# Altium PCB MyBus.PcbDoc
Units mm, origin at the board's own origin, x right, y up, seen from the top; angles counter-clockwise.
Board outline 243.02 x 226.22 mm, 2 copper layers (Top Layer, Bottom Layer); 112 components, 64 nets, 1804 pads, 0 vias.
Unrouted connection lines stored in the file: 1728.
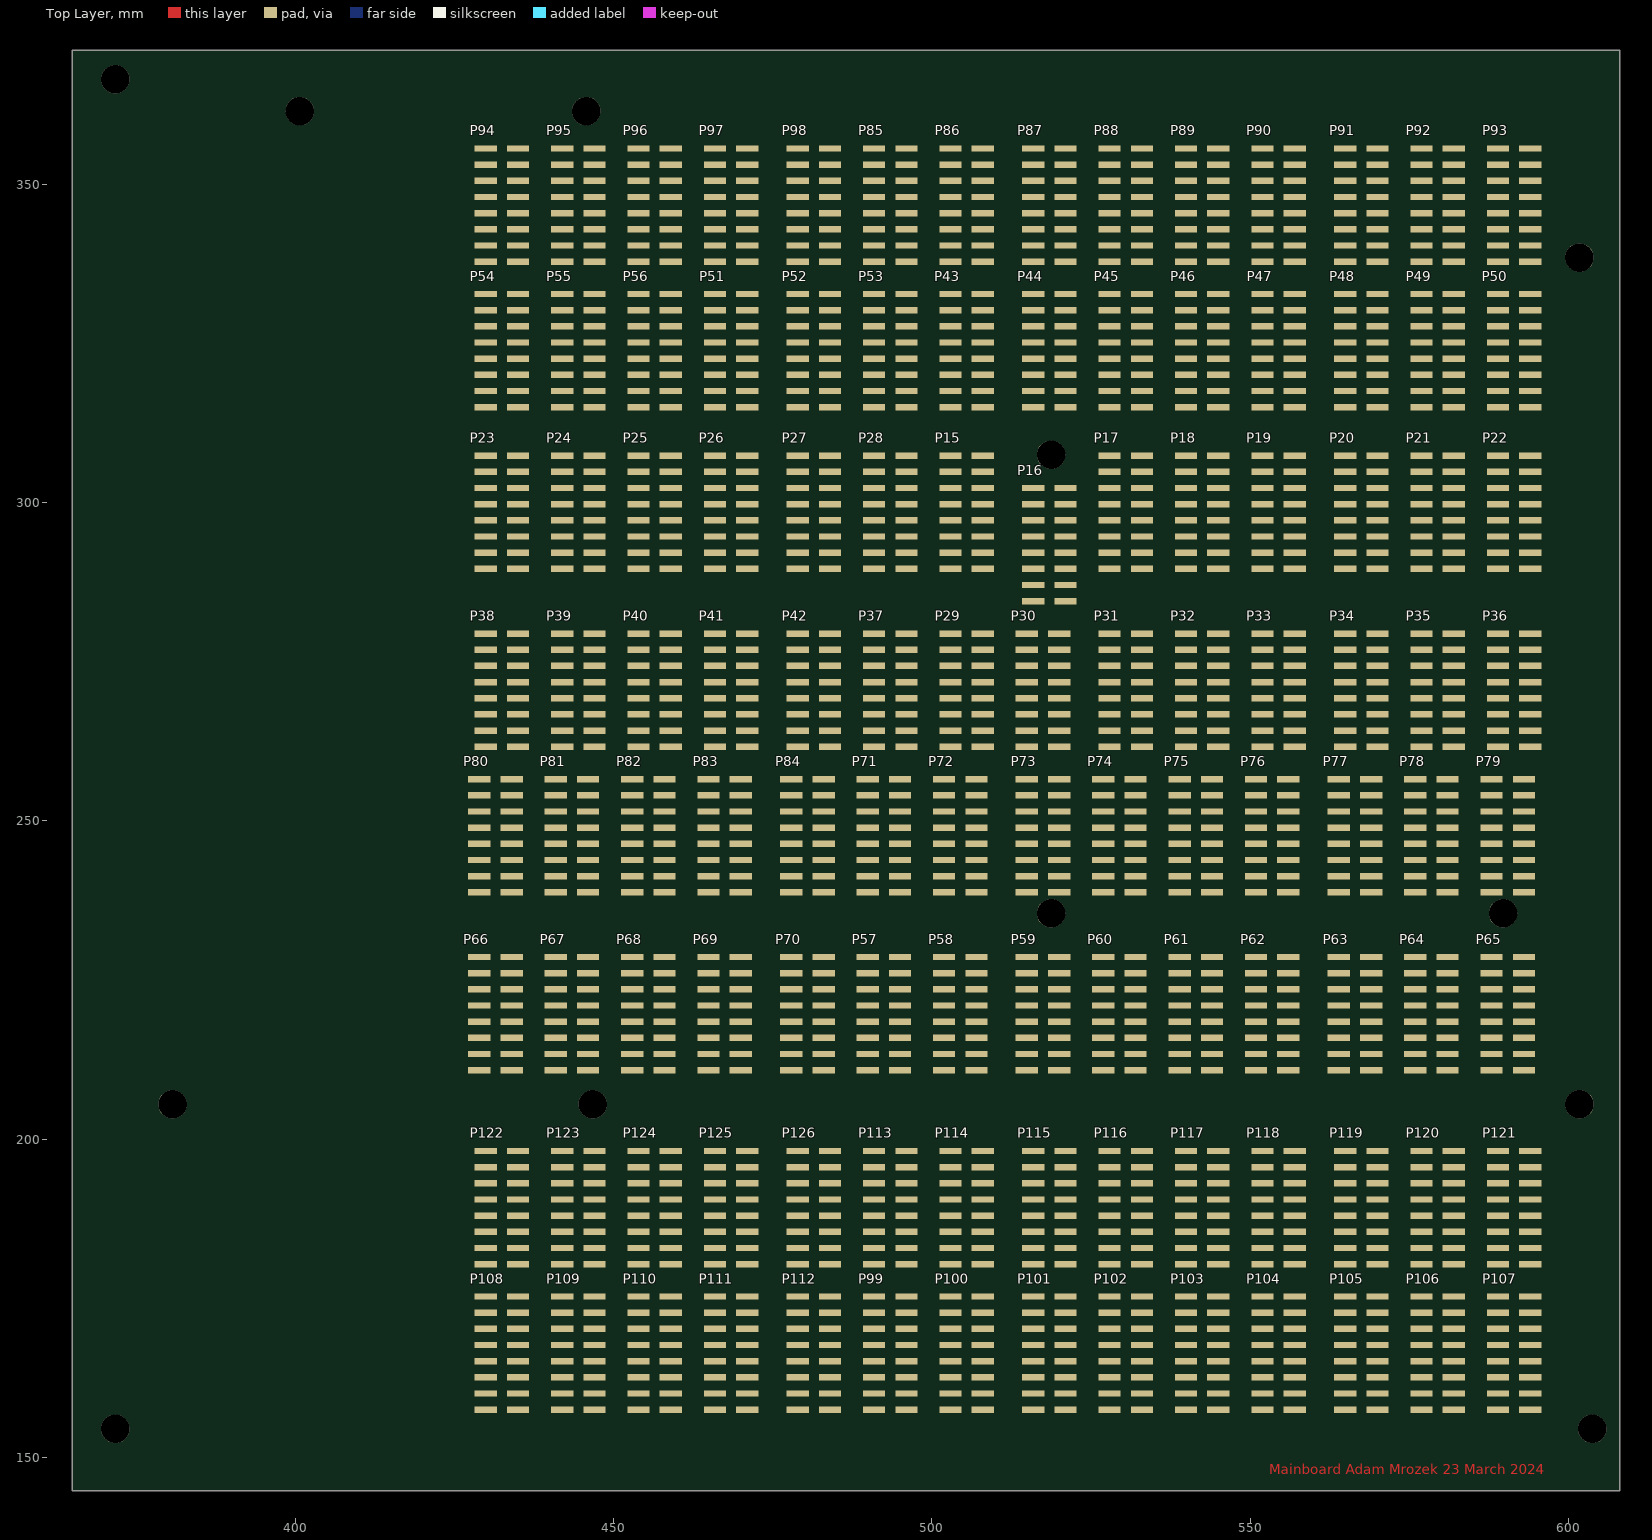
[diagram p0: Top Layer view]
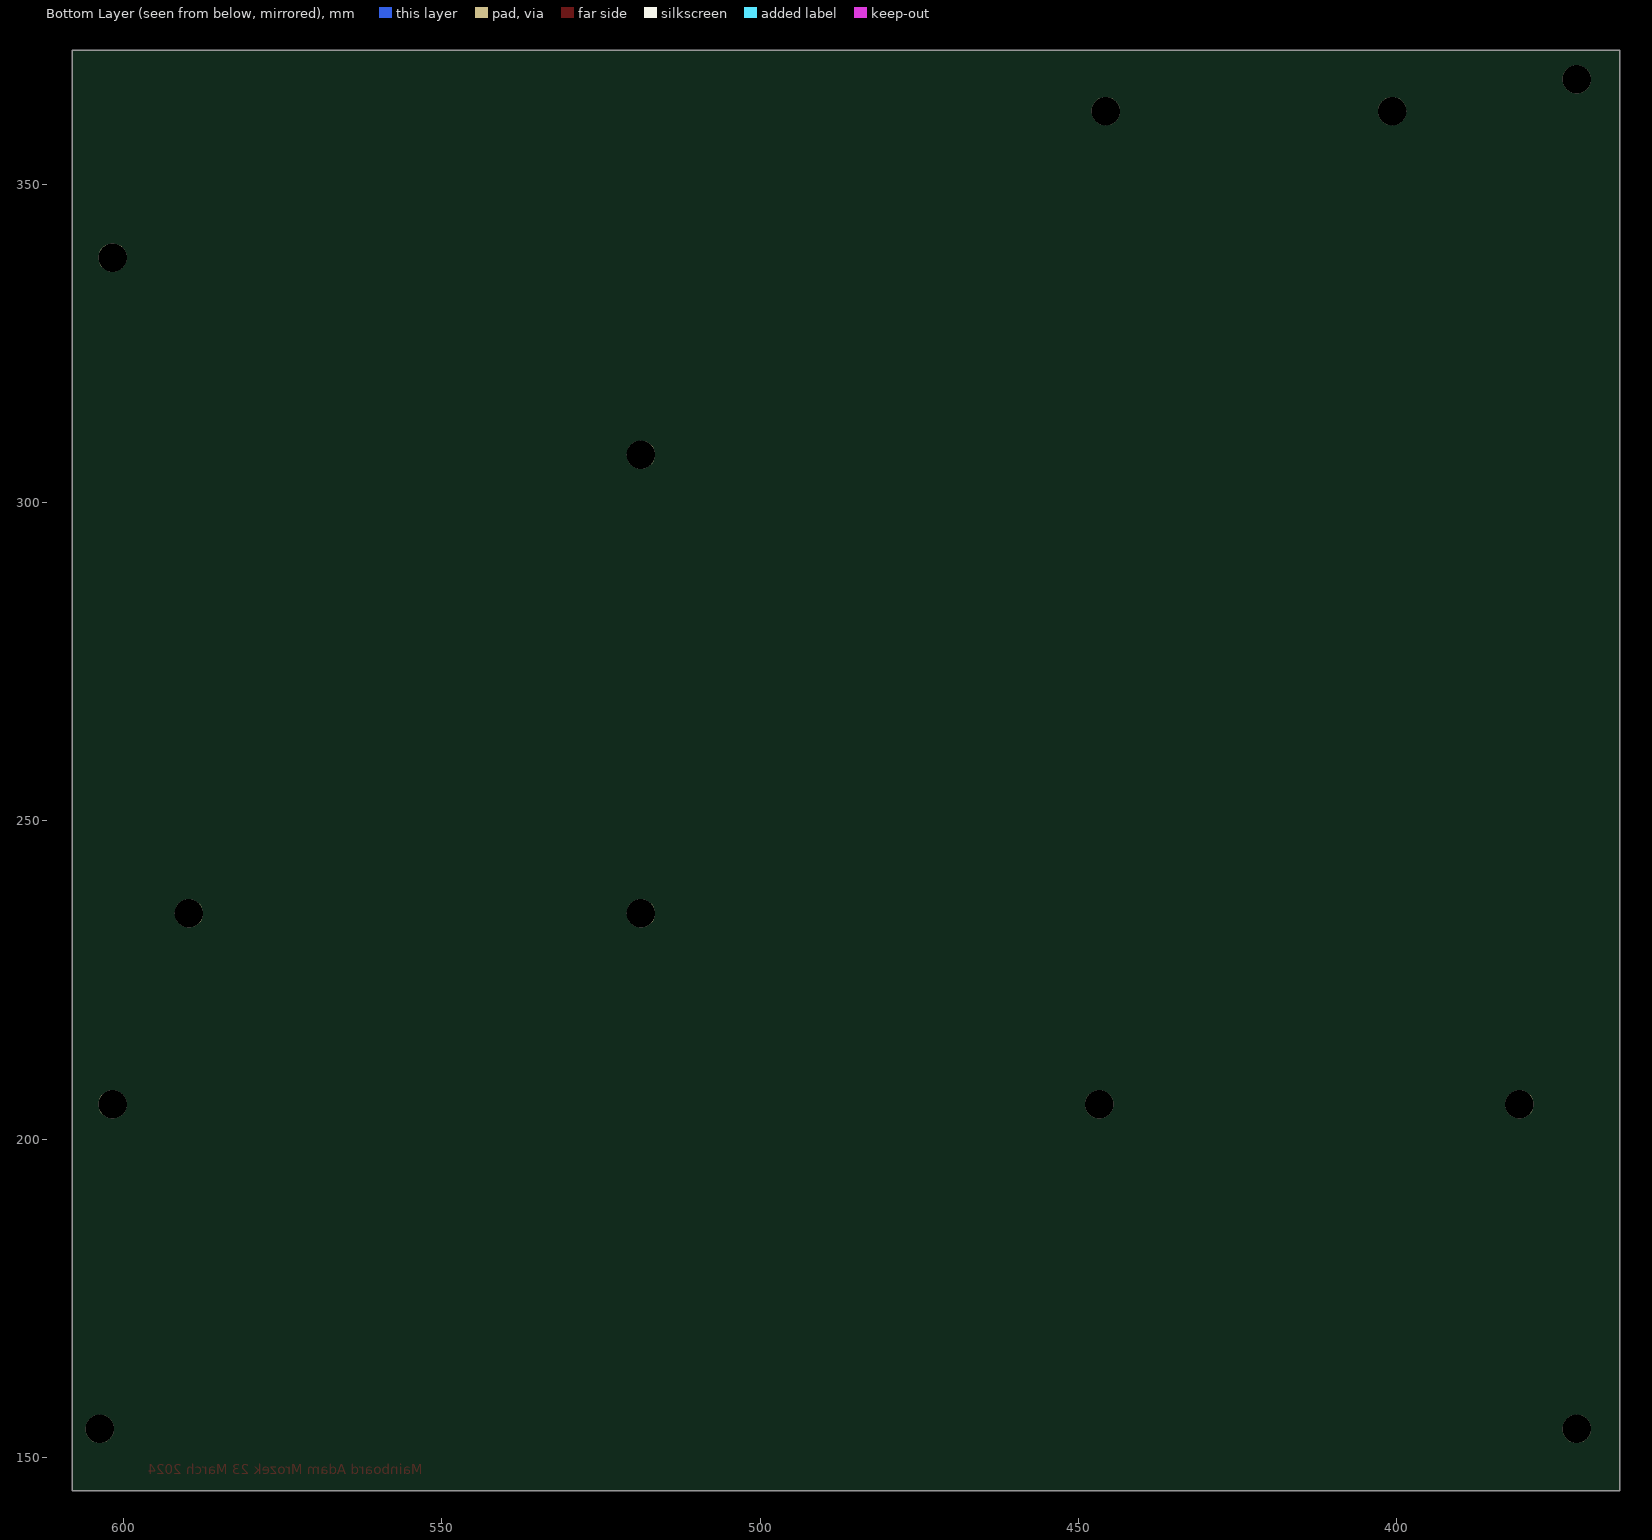
[diagram p1: Bottom Layer view, seen from below]

## Layer stack, top to bottom
Top Solder: solder mask 0.0102, Solder Resist, Dk 3.5
Top Layer: signal copper 0.0356
Dielectric 1: dielectric 0.32, FR-4, Dk 4.8
Bottom Layer: signal copper 0.0356
Bottom Solder: solder mask 0.0102, Solder Resist, Dk 3.5

## Board outline
365,144.78 365,371 608.025,371 608.025,144.78

## Design rules (kind name [scope] priority, off if disabled: settings)
Clearance [All] p1: gap=0.254 ignorepadtopadclearanceinfootprint=FALSE except(0: Arc-Hole Track-Hole SMDPad-Hole THPad-Hole Via-Hole Fill-Hole Poly-Hole Region-Hole Text-Hole)
PolygonConnect [All] p1: connectstyle=Relief reliefconductorwidth=0.254 reliefentries=4 polygonreliefangle="90 Angle" airgapwidth=0.5
RoomDefinition SubBus8 [InComponentClass('SubBus8')] p1: confinementstyle=ConfineIn formatcopy=TRUE lockcomponents=FALSE outline 0,0 50.8,0 50.8,25.4 0,25.4
RoomDefinition SubBus7 [InComponentClass('SubBus7')] p2: confinementstyle=ConfineIn formatcopy=TRUE lockcomponents=FALSE outline 0,0 50.8,0 50.8,25.4 0,25.4
RoomDefinition SubBus6 [InComponentClass('SubBus6')] p3: confinementstyle=ConfineIn formatcopy=TRUE lockcomponents=FALSE outline 0,0 50.8,0 50.8,25.4 0,25.4
RoomDefinition SubBus5 [InComponentClass('SubBus5')] p4: confinementstyle=ConfineIn formatcopy=TRUE lockcomponents=FALSE outline 0,0 50.8,0 50.8,25.4 0,25.4
RoomDefinition SubBus4 [InComponentClass('SubBus4')] p5: confinementstyle=ConfineIn formatcopy=TRUE lockcomponents=FALSE outline 0,0 50.8,0 50.8,25.4 0,25.4
RoomDefinition SubBus3 [InComponentClass('SubBus3')] p6: confinementstyle=ConfineIn formatcopy=TRUE lockcomponents=FALSE outline 0,0 50.8,0 50.8,25.4 0,25.4
RoomDefinition SubBus2 [InComponentClass('SubBus2')] p7: confinementstyle=ConfineIn formatcopy=TRUE lockcomponents=FALSE outline 0,0 50.8,0 50.8,25.4 0,25.4
RoomDefinition SubBus1 [InComponentClass('SubBus1')] p8: confinementstyle=ConfineIn formatcopy=TRUE lockcomponents=FALSE outline 0,0 50.8,0 50.8,25.4 0,25.4
RoutingVias [All] p1: holewidth=0.711 width=1.27 viastyle="Through Hole" minholewidth=0.711 minwidth=1.27 maxholewidth=0.711 maxwidth=1.27
SolderMaskExpansion [All] p1: expansion=0.102
Width [All] p1: maxlimit=1 minlimit=0.5 preferedwidth=1 minimp=50.000000 maximp=50.000000 favimp=50.000000
30 further rules are at their usual default settings.

## Classes and differential pairs
component class SubBus8: P113 P114 P115 P116 P117 P118 P119 P120 P121 P122 P123 P124 P125 P126
component class SubBus7: P99 P100 P101 P102 P103 P104 P105 P106 P107 P108 P109 P110 P111 P112
component class SubBus6: P85 P86 P87 P88 P89 P90 P91 P92 P93 P94 P95 P96 P97 P98
component class SubBus5: P71 P72 P73 P74 P75 P76 P77 P78 P79 P80 P81 P82 P83 P84
component class SubBus4: P57 P58 P59 P60 P61 P62 P63 P64 P65 P66 P67 P68 P69 P70
component class SubBus3: P43 P44 P45 P46 P47 P48 P49 P50 P51 P52 P53 P54 P55 P56
component class SubBus1: P29 P30 P31 P32 P33 P34 P35 P36 P37 P38 P39 P40 P41 P42
component class SubBus2: P15 P16 P17 P18 P19 P20 P21 P22 P23 P24 P25 P26 P27 P28

## Components (designator, comment, footprint, x,y, rotation, side; value= is the part's Value field where it differs from the comment)
P15 "2x8 Pin Header  SMD" 2X8_SMD_PH_2.54 508,289.56 r90 top value="2x8 Pin Header, 2.54mm, SMD"
P16 "2x8 Pin Header  SMD" 2X8_SMD_PH_2.54 521,284.48 r90 top value="2x8 Pin Header, 2.54mm, SMD"
P17 "2x8 Pin Header  SMD" 2X8_SMD_PH_2.54 533,289.56 r90 top value="2x8 Pin Header, 2.54mm, SMD"
P18 "2x8 Pin Header  SMD" 2X8_SMD_PH_2.54 545,289.56 r90 top value="2x8 Pin Header, 2.54mm, SMD"
P19 "2x8 Pin Header  SMD" 2X8_SMD_PH_2.54 557,289.56 r90 top value="2x8 Pin Header, 2.54mm, SMD"
P20 "2x8 Pin Header  SMD" 2X8_SMD_PH_2.54 570,289.56 r90 top value="2x8 Pin Header, 2.54mm, SMD"
P21 "2x8 Pin Header  SMD" 2X8_SMD_PH_2.54 582,289.56 r90 top value="2x8 Pin Header, 2.54mm, SMD"
P22 "2x8 Pin Header  SMD" 2X8_SMD_PH_2.54 594,289.56 r90 top value="2x8 Pin Header, 2.54mm, SMD"
P23 "2x8 Pin Header  SMD" 2X8_SMD_PH_2.54 435,289.56 r90 top value="2x8 Pin Header, 2.54mm, SMD"
P24 "2x8 Pin Header  SMD" 2X8_SMD_PH_2.54 447,289.56 r90 top value="2x8 Pin Header, 2.54mm, SMD"
P25 "2x8 Pin Header  SMD" 2X8_SMD_PH_2.54 459,289.56 r90 top value="2x8 Pin Header, 2.54mm, SMD"
P26 "2x8 Pin Header  SMD" 2X8_SMD_PH_2.54 471,289.56 r90 top value="2x8 Pin Header, 2.54mm, SMD"
P27 "2x8 Pin Header  SMD" 2X8_SMD_PH_2.54 484,289.56 r90 top value="2x8 Pin Header, 2.54mm, SMD"
P28 "2x8 Pin Header  SMD" 2X8_SMD_PH_2.54 496,289.56 r90 top value="2x8 Pin Header, 2.54mm, SMD"
P29 "2x8 Pin Header  SMD" 2X8_SMD_PH_2.54 508,261.62 r90 top value="2x8 Pin Header, 2.54mm, SMD"
P30 "2x8 Pin Header  SMD" 2X8_SMD_PH_2.54 520,261.62 r90 top value="2x8 Pin Header, 2.54mm, SMD"
P31 "2x8 Pin Header  SMD" 2X8_SMD_PH_2.54 533,261.62 r90 top value="2x8 Pin Header, 2.54mm, SMD"
P32 "2x8 Pin Header  SMD" 2X8_SMD_PH_2.54 545,261.62 r90 top value="2x8 Pin Header, 2.54mm, SMD"
P33 "2x8 Pin Header  SMD" 2X8_SMD_PH_2.54 557,261.62 r90 top value="2x8 Pin Header, 2.54mm, SMD"
P34 "2x8 Pin Header  SMD" 2X8_SMD_PH_2.54 570,261.62 r90 top value="2x8 Pin Header, 2.54mm, SMD"
P35 "2x8 Pin Header  SMD" 2X8_SMD_PH_2.54 582,261.62 r90 top value="2x8 Pin Header, 2.54mm, SMD"
P36 "2x8 Pin Header  SMD" 2X8_SMD_PH_2.54 594,261.62 r90 top value="2x8 Pin Header, 2.54mm, SMD"
P37 "2x8 Pin Header  SMD" 2X8_SMD_PH_2.54 496,261.62 r90 top value="2x8 Pin Header, 2.54mm, SMD"
P38 "2x8 Pin Header  SMD" 2X8_SMD_PH_2.54 435,261.62 r90 top value="2x8 Pin Header, 2.54mm, SMD"
P39 "2x8 Pin Header  SMD" 2X8_SMD_PH_2.54 447,261.62 r90 top value="2x8 Pin Header, 2.54mm, SMD"
P40 "2x8 Pin Header  SMD" 2X8_SMD_PH_2.54 459,261.62 r90 top value="2x8 Pin Header, 2.54mm, SMD"
P41 "2x8 Pin Header  SMD" 2X8_SMD_PH_2.54 471,261.62 r90 top value="2x8 Pin Header, 2.54mm, SMD"
P42 "2x8 Pin Header  SMD" 2X8_SMD_PH_2.54 484,261.62 r90 top value="2x8 Pin Header, 2.54mm, SMD"
P43 "2x8 Pin Header  SMD" 2X8_SMD_PH_2.54 508,314.96 r90 top value="2x8 Pin Header, 2.54mm, SMD"
P44 "2x8 Pin Header  SMD" 2X8_SMD_PH_2.54 521,314.96 r90 top value="2x8 Pin Header, 2.54mm, SMD"
P45 "2x8 Pin Header  SMD" 2X8_SMD_PH_2.54 533,314.96 r90 top value="2x8 Pin Header, 2.54mm, SMD"
P46 "2x8 Pin Header  SMD" 2X8_SMD_PH_2.54 545,314.96 r90 top value="2x8 Pin Header, 2.54mm, SMD"
P47 "2x8 Pin Header  SMD" 2X8_SMD_PH_2.54 557,314.96 r90 top value="2x8 Pin Header, 2.54mm, SMD"
P48 "2x8 Pin Header  SMD" 2X8_SMD_PH_2.54 570,314.96 r90 top value="2x8 Pin Header, 2.54mm, SMD"
P49 "2x8 Pin Header  SMD" 2X8_SMD_PH_2.54 582,314.96 r90 top value="2x8 Pin Header, 2.54mm, SMD"
P50 "2x8 Pin Header  SMD" 2X8_SMD_PH_2.54 594,314.96 r90 top value="2x8 Pin Header, 2.54mm, SMD"
P51 "2x8 Pin Header  SMD" 2X8_SMD_PH_2.54 471,314.96 r90 top value="2x8 Pin Header, 2.54mm, SMD"
P52 "2x8 Pin Header  SMD" 2X8_SMD_PH_2.54 484,314.96 r90 top value="2x8 Pin Header, 2.54mm, SMD"
P53 "2x8 Pin Header  SMD" 2X8_SMD_PH_2.54 496,314.96 r90 top value="2x8 Pin Header, 2.54mm, SMD"
P54 "2x8 Pin Header  SMD" 2X8_SMD_PH_2.54 435,314.96 r90 top value="2x8 Pin Header, 2.54mm, SMD"
P55 "2x8 Pin Header  SMD" 2X8_SMD_PH_2.54 447,314.96 r90 top value="2x8 Pin Header, 2.54mm, SMD"
P56 "2x8 Pin Header  SMD" 2X8_SMD_PH_2.54 459,314.96 r90 top value="2x8 Pin Header, 2.54mm, SMD"
P57 "2x8 Pin Header  SMD" 2X8_SMD_PH_2.54 495,210.82 r90 top value="2x8 Pin Header, 2.54mm, SMD"
P58 "2x8 Pin Header  SMD" 2X8_SMD_PH_2.54 507,210.82 r90 top value="2x8 Pin Header, 2.54mm, SMD"
P59 "2x8 Pin Header  SMD" 2X8_SMD_PH_2.54 520,210.82 r90 top value="2x8 Pin Header, 2.54mm, SMD"
P60 "2x8 Pin Header  SMD" 2X8_SMD_PH_2.54 532,210.82 r90 top value="2x8 Pin Header, 2.54mm, SMD"
P61 "2x8 Pin Header  SMD" 2X8_SMD_PH_2.54 544,210.82 r90 top value="2x8 Pin Header, 2.54mm, SMD"
P62 "2x8 Pin Header  SMD" 2X8_SMD_PH_2.54 556,210.82 r90 top value="2x8 Pin Header, 2.54mm, SMD"
P63 "2x8 Pin Header  SMD" 2X8_SMD_PH_2.54 569,210.82 r90 top value="2x8 Pin Header, 2.54mm, SMD"
P64 "2x8 Pin Header  SMD" 2X8_SMD_PH_2.54 581,210.82 r90 top value="2x8 Pin Header, 2.54mm, SMD"
P65 "2x8 Pin Header  SMD" 2X8_SMD_PH_2.54 593,210.82 r90 top value="2x8 Pin Header, 2.54mm, SMD"
P66 "2x8 Pin Header  SMD" 2X8_SMD_PH_2.54 434,210.82 r90 top value="2x8 Pin Header, 2.54mm, SMD"
P67 "2x8 Pin Header  SMD" 2X8_SMD_PH_2.54 446,210.82 r90 top value="2x8 Pin Header, 2.54mm, SMD"
P68 "2x8 Pin Header  SMD" 2X8_SMD_PH_2.54 458,210.82 r90 top value="2x8 Pin Header, 2.54mm, SMD"
P69 "2x8 Pin Header  SMD" 2X8_SMD_PH_2.54 470,210.82 r90 top value="2x8 Pin Header, 2.54mm, SMD"
P70 "2x8 Pin Header  SMD" 2X8_SMD_PH_2.54 483,210.82 r90 top value="2x8 Pin Header, 2.54mm, SMD"
P71 "2x8 Pin Header  SMD" 2X8_SMD_PH_2.54 495,238.76 r90 top value="2x8 Pin Header, 2.54mm, SMD"
P72 "2x8 Pin Header  SMD" 2X8_SMD_PH_2.54 507,238.76 r90 top value="2x8 Pin Header, 2.54mm, SMD"
P73 "2x8 Pin Header  SMD" 2X8_SMD_PH_2.54 520,238.76 r90 top value="2x8 Pin Header, 2.54mm, SMD"
P74 "2x8 Pin Header  SMD" 2X8_SMD_PH_2.54 532,238.76 r90 top value="2x8 Pin Header, 2.54mm, SMD"
P75 "2x8 Pin Header  SMD" 2X8_SMD_PH_2.54 544,238.76 r90 top value="2x8 Pin Header, 2.54mm, SMD"
P76 "2x8 Pin Header  SMD" 2X8_SMD_PH_2.54 556,238.76 r90 top value="2x8 Pin Header, 2.54mm, SMD"
P77 "2x8 Pin Header  SMD" 2X8_SMD_PH_2.54 569,238.76 r90 top value="2x8 Pin Header, 2.54mm, SMD"
P78 "2x8 Pin Header  SMD" 2X8_SMD_PH_2.54 581,238.76 r90 top value="2x8 Pin Header, 2.54mm, SMD"
P79 "2x8 Pin Header  SMD" 2X8_SMD_PH_2.54 593,238.76 r90 top value="2x8 Pin Header, 2.54mm, SMD"
P80 "2x8 Pin Header  SMD" 2X8_SMD_PH_2.54 434,238.76 r90 top value="2x8 Pin Header, 2.54mm, SMD"
P81 "2x8 Pin Header  SMD" 2X8_SMD_PH_2.54 446,238.76 r90 top value="2x8 Pin Header, 2.54mm, SMD"
P82 "2x8 Pin Header  SMD" 2X8_SMD_PH_2.54 458,238.76 r90 top value="2x8 Pin Header, 2.54mm, SMD"
P83 "2x8 Pin Header  SMD" 2X8_SMD_PH_2.54 470,238.76 r90 top value="2x8 Pin Header, 2.54mm, SMD"
P84 "2x8 Pin Header  SMD" 2X8_SMD_PH_2.54 483,238.76 r90 top value="2x8 Pin Header, 2.54mm, SMD"
P85 "2x8 Pin Header  SMD" 2X8_SMD_PH_2.54 496,337.82 r90 top value="2x8 Pin Header, 2.54mm, SMD"
P86 "2x8 Pin Header  SMD" 2X8_SMD_PH_2.54 508,337.82 r90 top value="2x8 Pin Header, 2.54mm, SMD"
P87 "2x8 Pin Header  SMD" 2X8_SMD_PH_2.54 521,337.82 r90 top value="2x8 Pin Header, 2.54mm, SMD"
P88 "2x8 Pin Header  SMD" 2X8_SMD_PH_2.54 533,337.82 r90 top value="2x8 Pin Header, 2.54mm, SMD"
P89 "2x8 Pin Header  SMD" 2X8_SMD_PH_2.54 545,337.82 r90 top value="2x8 Pin Header, 2.54mm, SMD"
P90 "2x8 Pin Header  SMD" 2X8_SMD_PH_2.54 557,337.82 r90 top value="2x8 Pin Header, 2.54mm, SMD"
P91 "2x8 Pin Header  SMD" 2X8_SMD_PH_2.54 570,337.82 r90 top value="2x8 Pin Header, 2.54mm, SMD"
P92 "2x8 Pin Header  SMD" 2X8_SMD_PH_2.54 582,337.82 r90 top value="2x8 Pin Header, 2.54mm, SMD"
P93 "2x8 Pin Header  SMD" 2X8_SMD_PH_2.54 594,337.82 r90 top value="2x8 Pin Header, 2.54mm, SMD"
P94 "2x8 Pin Header  SMD" 2X8_SMD_PH_2.54 435,337.82 r90 top value="2x8 Pin Header, 2.54mm, SMD"
P95 "2x8 Pin Header  SMD" 2X8_SMD_PH_2.54 447,337.82 r90 top value="2x8 Pin Header, 2.54mm, SMD"
P96 "2x8 Pin Header  SMD" 2X8_SMD_PH_2.54 459,337.82 r90 top value="2x8 Pin Header, 2.54mm, SMD"
P97 "2x8 Pin Header  SMD" 2X8_SMD_PH_2.54 471,337.82 r90 top value="2x8 Pin Header, 2.54mm, SMD"
P98 "2x8 Pin Header  SMD" 2X8_SMD_PH_2.54 484,337.82 r90 top value="2x8 Pin Header, 2.54mm, SMD"
P99 "2x8 Pin Header  SMD" 2X8_SMD_PH_2.54 496,157.48 r90 top value="2x8 Pin Header, 2.54mm, SMD"
P100 "2x8 Pin Header  SMD" 2X8_SMD_PH_2.54 508,157.48 r90 top value="2x8 Pin Header, 2.54mm, SMD"
P101 "2x8 Pin Header  SMD" 2X8_SMD_PH_2.54 521,157.48 r90 top value="2x8 Pin Header, 2.54mm, SMD"
P102 "2x8 Pin Header  SMD" 2X8_SMD_PH_2.54 533,157.48 r90 top value="2x8 Pin Header, 2.54mm, SMD"
P103 "2x8 Pin Header  SMD" 2X8_SMD_PH_2.54 545,157.48 r90 top value="2x8 Pin Header, 2.54mm, SMD"
P104 "2x8 Pin Header  SMD" 2X8_SMD_PH_2.54 557,157.48 r90 top value="2x8 Pin Header, 2.54mm, SMD"
P105 "2x8 Pin Header  SMD" 2X8_SMD_PH_2.54 570,157.48 r90 top value="2x8 Pin Header, 2.54mm, SMD"
P106 "2x8 Pin Header  SMD" 2X8_SMD_PH_2.54 582,157.48 r90 top value="2x8 Pin Header, 2.54mm, SMD"
P107 "2x8 Pin Header  SMD" 2X8_SMD_PH_2.54 594,157.48 r90 top value="2x8 Pin Header, 2.54mm, SMD"
P108 "2x8 Pin Header  SMD" 2X8_SMD_PH_2.54 435,157.48 r90 top value="2x8 Pin Header, 2.54mm, SMD"
P109 "2x8 Pin Header  SMD" 2X8_SMD_PH_2.54 447,157.48 r90 top value="2x8 Pin Header, 2.54mm, SMD"
P110 "2x8 Pin Header  SMD" 2X8_SMD_PH_2.54 459,157.48 r90 top value="2x8 Pin Header, 2.54mm, SMD"
P111 "2x8 Pin Header  SMD" 2X8_SMD_PH_2.54 471,157.48 r90 top value="2x8 Pin Header, 2.54mm, SMD"
P112 "2x8 Pin Header  SMD" 2X8_SMD_PH_2.54 484,157.48 r90 top value="2x8 Pin Header, 2.54mm, SMD"
P113 "2x8 Pin Header  SMD" 2X8_SMD_PH_2.54 496,180.34 r90 top value="2x8 Pin Header, 2.54mm, SMD"
P114 "2x8 Pin Header  SMD" 2X8_SMD_PH_2.54 508,180.34 r90 top value="2x8 Pin Header, 2.54mm, SMD"
P115 "2x8 Pin Header  SMD" 2X8_SMD_PH_2.54 521,180.34 r90 top value="2x8 Pin Header, 2.54mm, SMD"
P116 "2x8 Pin Header  SMD" 2X8_SMD_PH_2.54 533,180.34 r90 top value="2x8 Pin Header, 2.54mm, SMD"
P117 "2x8 Pin Header  SMD" 2X8_SMD_PH_2.54 545,180.34 r90 top value="2x8 Pin Header, 2.54mm, SMD"
P118 "2x8 Pin Header  SMD" 2X8_SMD_PH_2.54 557,180.34 r90 top value="2x8 Pin Header, 2.54mm, SMD"
P119 "2x8 Pin Header  SMD" 2X8_SMD_PH_2.54 570,180.34 r90 top value="2x8 Pin Header, 2.54mm, SMD"
P120 "2x8 Pin Header  SMD" 2X8_SMD_PH_2.54 582,180.34 r90 top value="2x8 Pin Header, 2.54mm, SMD"
P121 "2x8 Pin Header  SMD" 2X8_SMD_PH_2.54 594,180.34 r90 top value="2x8 Pin Header, 2.54mm, SMD"
P122 "2x8 Pin Header  SMD" 2X8_SMD_PH_2.54 435,180.34 r90 top value="2x8 Pin Header, 2.54mm, SMD"
P123 "2x8 Pin Header  SMD" 2X8_SMD_PH_2.54 447,180.34 r90 top value="2x8 Pin Header, 2.54mm, SMD"
P124 "2x8 Pin Header  SMD" 2X8_SMD_PH_2.54 459,180.34 r90 top value="2x8 Pin Header, 2.54mm, SMD"
P125 "2x8 Pin Header  SMD" 2X8_SMD_PH_2.54 471,180.34 r90 top value="2x8 Pin Header, 2.54mm, SMD"
P126 "2x8 Pin Header  SMD" 2X8_SMD_PH_2.54 484,180.34 r90 top value="2x8 Pin Header, 2.54mm, SMD"

## Footprints (in the part's own frame and the unit in brackets; to place one, negate y for a bottom-side part, rotate by r counter-clockwise, add the part's x,y. Pads: shape width x height; smd on the part's side, far side on the other; paste and mask are expansions set on the pad)
2X8_SMD_PH_2.54 [mm] "2x8Pin Header 2.54 mm"
  rect 1x3.5 smd: 1(0,0) 2(2.54,0) 3(5.08,0) 4(7.62,0) 5(10.16,0) 6(12.7,0) 7(15.24,0) 8(17.78,0) 9(17.78,5.08) 10(15.24,5.08) 11(12.7,5.08) 12(10.16,5.08) 13(7.62,5.08) 14(5.08,5.08) 15(2.54,5.08) 16(0,5.08)
  body extent -1.27,-3.17 19.05,7.84, height 9.81

## Part data
P15 P16 P17 P18 P19 P20 P21 P22 P23 P24 P25 P26 P27 P28 P29 P30 P31 P32 P33 P34 P35 P36 P37 P38 P39 P40 P41 P42 P43 P44 P45 P46 P47 P48 P49 P50 P51 P52 P53 P54 P55 P56 P57 P58 P59 P60 P61 P62 P63 P64 P65 P66 P67 P68 P69 P70 P71 P72 P73 P74 P75 P76 P77 P78 P79 P80 P81 P82 P83 P84 P85 P86 P87 P88 P89 P90 P91 P92 P93 P94 P95 P96 P97 P98 P99 P100 P101 P102 P103 P104 P105 P106 P107 P108 P109 P110 P111 P112 P113 P114 P115 P116 P117 P118 P119 P120 P121 P122 P123 P124 P125 P126: "2.54mm, SMD", Farnell=2356242

## Free pads (board coordinates)
  round 4.472 hole 4.472: 1(371.725,154.47) 1(371.725,366.47) 1(380.725,205.47) 1(400.725,361.47) 1(445.725,361.47) 1(446.725,205.47) 1(518.725,235.47) 1(518.725,307.47) 1(589.725,235.47) 1(601.725,205.47) 1(601.725,338.47) 1(603.725,154.47)

## Nets (pads, with @x,y where several pads share a name; then routed paths per layer and width w, separated by ;. In a path a pad name is that pad's centre, name@x,y a point inside that pad or via, vN(x,y) a via of type N, cw(c..) or ccw(c..) an arc to the next point about the centre after c; other vN are vias at no path point)
Bus1Pin1: P29.1 P29.16 P30.1 P30.16 P31.1 P31.16 P32.1 P32.16 P33.1 P33.16 P34.1 P34.16 P35.1 P35.16 P36.1 P36.16 P37.1 P37.16 P38.1 P38.16 P39.1 P39.16 P40.1 P40.16 P41.1 P41.16 P42.1 P42.16
Bus1Pin2: P29.2 P29.15 P30.2 P30.15 P31.2 P31.15 P32.2 P32.15 P33.2 P33.15 P34.2 P34.15 P35.2 P35.15 P36.2 P36.15 P37.2 P37.15 P38.2 P38.15 P39.2 P39.15 P40.2 P40.15 P41.2 P41.15 P42.2 P42.15
Bus1Pin3: P29.3 P29.14 P30.3 P30.14 P31.3 P31.14 P32.3 P32.14 P33.3 P33.14 P34.3 P34.14 P35.3 P35.14 P36.3 P36.14 P37.3 P37.14 P38.3 P38.14 P39.3 P39.14 P40.3 P40.14 P41.3 P41.14 P42.3 P42.14
Bus1Pin4: P29.4 P29.13 P30.4 P30.13 P31.4 P31.13 P32.4 P32.13 P33.4 P33.13 P34.4 P34.13 P35.4 P35.13 P36.4 P36.13 P37.4 P37.13 P38.4 P38.13 P39.4 P39.13 P40.4 P40.13 P41.4 P41.13 P42.4 P42.13
Bus1Pin5: P29.5 P29.12 P30.5 P30.12 P31.5 P31.12 P32.5 P32.12 P33.5 P33.12 P34.5 P34.12 P35.5 P35.12 P36.5 P36.12 P37.5 P37.12 P38.5 P38.12 P39.5 P39.12 P40.5 P40.12 P41.5 P41.12 P42.5 P42.12
Bus1Pin6: P29.6 P29.11 P30.6 P30.11 P31.6 P31.11 P32.6 P32.11 P33.6 P33.11 P34.6 P34.11 P35.6 P35.11 P36.6 P36.11 P37.6 P37.11 P38.6 P38.11 P39.6 P39.11 P40.6 P40.11 P41.6 P41.11 P42.6 P42.11
Bus1Pin7: P29.7 P29.10 P30.7 P30.10 P31.7 P31.10 P32.7 P32.10 P33.7 P33.10 P34.7 P34.10 P35.7 P35.10 P36.7 P36.10 P37.7 P37.10 P38.7 P38.10 P39.7 P39.10 P40.7 P40.10 P41.7 P41.10 P42.7 P42.10
Bus1Pin8: P29.8 P29.9 P30.8 P30.9 P31.8 P31.9 P32.8 P32.9 P33.8 P33.9 P34.8 P34.9 P35.8 P35.9 P36.8 P36.9 P37.8 P37.9 P38.8 P38.9 P39.8 P39.9 P40.8 P40.9 P41.8 P41.9 P42.8 P42.9
Bus2Pin1: P15.1 P15.16 P16.1 P16.16 P17.1 P17.16 P18.1 P18.16 P19.1 P19.16 P20.1 P20.16 P21.1 P21.16 P22.1 P22.16 P23.1 P23.16 P24.1 P24.16 P25.1 P25.16 P26.1 P26.16 P27.1 P27.16 P28.1 P28.16
Bus2Pin2: P15.2 P15.15 P16.2 P16.15 P17.2 P17.15 P18.2 P18.15 P19.2 P19.15 P20.2 P20.15 P21.2 P21.15 P22.2 P22.15 P23.2 P23.15 P24.2 P24.15 P25.2 P25.15 P26.2 P26.15 P27.2 P27.15 P28.2 P28.15
Bus2Pin3: P15.3 P15.14 P16.3 P16.14 P17.3 P17.14 P18.3 P18.14 P19.3 P19.14 P20.3 P20.14 P21.3 P21.14 P22.3 P22.14 P23.3 P23.14 P24.3 P24.14 P25.3 P25.14 P26.3 P26.14 P27.3 P27.14 P28.3 P28.14
Bus2Pin4: P15.4 P15.13 P16.4 P16.13 P17.4 P17.13 P18.4 P18.13 P19.4 P19.13 P20.4 P20.13 P21.4 P21.13 P22.4 P22.13 P23.4 P23.13 P24.4 P24.13 P25.4 P25.13 P26.4 P26.13 P27.4 P27.13 P28.4 P28.13
Bus2Pin5: P15.5 P15.12 P16.5 P16.12 P17.5 P17.12 P18.5 P18.12 P19.5 P19.12 P20.5 P20.12 P21.5 P21.12 P22.5 P22.12 P23.5 P23.12 P24.5 P24.12 P25.5 P25.12 P26.5 P26.12 P27.5 P27.12 P28.5 P28.12
Bus2Pin6: P15.6 P15.11 P16.6 P16.11 P17.6 P17.11 P18.6 P18.11 P19.6 P19.11 P20.6 P20.11 P21.6 P21.11 P22.6 P22.11 P23.6 P23.11 P24.6 P24.11 P25.6 P25.11 P26.6 P26.11 P27.6 P27.11 P28.6 P28.11
Bus2Pin7: P15.7 P15.10 P16.7 P16.10 P17.7 P17.10 P18.7 P18.10 P19.7 P19.10 P20.7 P20.10 P21.7 P21.10 P22.7 P22.10 P23.7 P23.10 P24.7 P24.10 P25.7 P25.10 P26.7 P26.10 P27.7 P27.10 P28.7 P28.10
Bus2Pin8: P15.8 P15.9 P16.8 P16.9 P17.8 P17.9 P18.8 P18.9 P19.8 P19.9 P20.8 P20.9 P21.8 P21.9 P22.8 P22.9 P23.8 P23.9 P24.8 P24.9 P25.8 P25.9 P26.8 P26.9 P27.8 P27.9 P28.8 P28.9
Bus3Pin1: P51.1 P51.2 P51.3 P51.4 P51.5 P51.6 P51.7 P51.8 P51.9 P51.10 P51.11 P51.12 P51.13 P51.14 P51.15 P51.16 P52.1 P52.2 P52.3 P52.4 P52.9 P52.10 P52.11 P52.12 P52.13 P52.14 P52.15 P52.16
Bus3Pin2: P43.9 P43.10 P43.11 P43.12 P43.13 P43.14 P43.15 P43.16 P52.5 P52.6 P52.7 P52.8 P53.1 P53.2 P53.3 P53.4 P53.5 P53.6 P53.7 P53.8 P53.9 P53.10 P53.11 P53.12 P53.13 P53.14 P53.15 P53.16
Bus3Pin3: P43.1 P43.2 P43.3 P43.4 P43.5 P43.6 P43.7 P43.8 P44.1 P44.2 P44.3 P44.4 P44.5 P44.6 P44.7 P44.8 P44.9 P44.10 P44.11 P44.12 P44.13 P44.14 P44.15 P44.16 P45.13 P45.14 P45.15 P45.16
Bus3Pin4: P45.1 P45.2 P45.3 P45.4 P45.5 P45.6 P45.7 P45.8 P45.9 P45.10 P45.11 P45.12 P46.1 P46.2 P46.3 P46.4 P46.5 P46.6 P46.7 P46.8 P46.9 P46.10 P46.11 P46.12 P46.13 P46.14 P46.15 P46.16
Bus3Pin5: P47.1 P47.2 P47.3 P47.4 P47.5 P47.6 P47.7 P47.8 P47.9 P47.10 P47.11 P47.12 P47.13 P47.14 P47.15 P47.16 P48.1 P48.2 P48.3 P48.4 P48.9 P48.10 P48.11 P48.12 P48.13 P48.14 P48.15 P48.16
Bus3Pin6: P48.5 P48.6 P48.7 P48.8 P49.1 P49.2 P49.3 P49.4 P49.5 P49.6 P49.7 P49.8 P49.9 P49.10 P49.11 P49.12 P49.13 P49.14 P49.15 P49.16 P50.9 P50.10 P50.11 P50.12 P50.13 P50.14 P50.15 P50.16
Bus3Pin7: P50.1 P50.2 P50.3 P50.4 P50.5 P50.6 P50.7 P50.8 P54.1 P54.2 P54.3 P54.4 P54.5 P54.6 P54.7 P54.8 P54.9 P54.10 P54.11 P54.12 P54.13 P54.14 P54.15 P54.16 P55.13 P55.14 P55.15 P55.16
Bus3Pin8: P55.1 P55.2 P55.3 P55.4 P55.5 P55.6 P55.7 P55.8 P55.9 P55.10 P55.11 P55.12 P56.1 P56.2 P56.3 P56.4 P56.5 P56.6 P56.7 P56.8 P56.9 P56.10 P56.11 P56.12 P56.13 P56.14 P56.15 P56.16
Bus4Pin1: P57.1 P57.2 P57.3 P57.4 P57.5 P57.6 P57.7 P57.8 P57.9 P57.10 P57.11 P57.12 P57.13 P57.14 P57.15 P57.16 P58.1 P58.2 P58.3 P58.4 P58.9 P58.10 P58.11 P58.12 P58.13 P58.14 P58.15 P58.16
Bus4Pin2: P58.5 P58.6 P58.7 P58.8 P59.1 P59.2 P59.3 P59.4 P59.5 P59.6 P59.7 P59.8 P59.9 P59.10 P59.11 P59.12 P59.13 P59.14 P59.15 P59.16 P60.9 P60.10 P60.11 P60.12 P60.13 P60.14 P60.15 P60.16
Bus4Pin3: P60.1 P60.2 P60.3 P60.4 P60.5 P60.6 P60.7 P60.8 P61.1 P61.2 P61.3 P61.4 P61.5 P61.6 P61.7 P61.8 P61.9 P61.10 P61.11 P61.12 P61.13 P61.14 P61.15 P61.16 P62.13 P62.14 P62.15 P62.16
Bus4Pin4: P62.1 P62.2 P62.3 P62.4 P62.5 P62.6 P62.7 P62.8 P62.9 P62.10 P62.11 P62.12 P63.1 P63.2 P63.3 P63.4 P63.5 P63.6 P63.7 P63.8 P63.9 P63.10 P63.11 P63.12 P63.13 P63.14 P63.15 P63.16
Bus4Pin5: P64.1 P64.2 P64.3 P64.4 P64.5 P64.6 P64.7 P64.8 P64.9 P64.10 P64.11 P64.12 P64.13 P64.14 P64.15 P64.16 P65.1 P65.2 P65.3 P65.4 P65.9 P65.10 P65.11 P65.12 P65.13 P65.14 P65.15 P65.16
Bus4Pin6: P65.5 P65.6 P65.7 P65.8 P66.1 P66.2 P66.3 P66.4 P66.5 P66.6 P66.7 P66.8 P66.9 P66.10 P66.11 P66.12 P66.13 P66.14 P66.15 P66.16 P67.9 P67.10 P67.11 P67.12 P67.13 P67.14 P67.15 P67.16
Bus4Pin7: P67.1 P67.2 P67.3 P67.4 P67.5 P67.6 P67.7 P67.8 P68.1 P68.2 P68.3 P68.4 P68.5 P68.6 P68.7 P68.8 P68.9 P68.10 P68.11 P68.12 P68.13 P68.14 P68.15 P68.16 P69.13 P69.14 P69.15 P69.16
Bus4Pin8: P69.1 P69.2 P69.3 P69.4 P69.5 P69.6 P69.7 P69.8 P69.9 P69.10 P69.11 P69.12 P70.1 P70.2 P70.3 P70.4 P70.5 P70.6 P70.7 P70.8 P70.9 P70.10 P70.11 P70.12 P70.13 P70.14 P70.15 P70.16
Bus5Pin1: P71.1 P71.16 P72.1 P72.16 P73.1 P73.16 P74.1 P74.16 P75.1 P75.16 P76.1 P76.16 P77.1 P77.16 P78.1 P78.16 P79.1 P79.16 P80.1 P80.16 P81.1 P81.16 P82.1 P82.16 P83.1 P83.16 P84.1 P84.16
Bus5Pin2: P71.2 P71.15 P72.2 P72.15 P73.2 P73.15 P74.2 P74.15 P75.2 P75.15 P76.2 P76.15 P77.2 P77.15 P78.2 P78.15 P79.2 P79.15 P80.2 P80.15 P81.2 P81.15 P82.2 P82.15 P83.2 P83.15 P84.2 P84.15
Bus5Pin3: P71.3 P71.14 P72.3 P72.14 P73.3 P73.14 P74.3 P74.14 P75.3 P75.14 P76.3 P76.14 P77.3 P77.14 P78.3 P78.14 P79.3 P79.14 P80.3 P80.14 P81.3 P81.14 P82.3 P82.14 P83.3 P83.14 P84.3 P84.14
Bus5Pin4: P71.4 P71.13 P72.4 P72.13 P73.4 P73.13 P74.4 P74.13 P75.4 P75.13 P76.4 P76.13 P77.4 P77.13 P78.4 P78.13 P79.4 P79.13 P80.4 P80.13 P81.4 P81.13 P82.4 P82.13 P83.4 P83.13 P84.4 P84.13
Bus5Pin5: P71.5 P71.12 P72.5 P72.12 P73.5 P73.12 P74.5 P74.12 P75.5 P75.12 P76.5 P76.12 P77.5 P77.12 P78.5 P78.12 P79.5 P79.12 P80.5 P80.12 P81.5 P81.12 P82.5 P82.12 P83.5 P83.12 P84.5 P84.12
Bus5Pin6: P71.6 P71.11 P72.6 P72.11 P73.6 P73.11 P74.6 P74.11 P75.6 P75.11 P76.6 P76.11 P77.6 P77.11 P78.6 P78.11 P79.6 P79.11 P80.6 P80.11 P81.6 P81.11 P82.6 P82.11 P83.6 P83.11 P84.6 P84.11
Bus5Pin7: P71.7 P71.10 P72.7 P72.10 P73.7 P73.10 P74.7 P74.10 P75.7 P75.10 P76.7 P76.10 P77.7 P77.10 P78.7 P78.10 P79.7 P79.10 P80.7 P80.10 P81.7 P81.10 P82.7 P82.10 P83.7 P83.10 P84.7 P84.10
Bus5Pin8: P71.8 P71.9 P72.8 P72.9 P73.8 P73.9 P74.8 P74.9 P75.8 P75.9 P76.8 P76.9 P77.8 P77.9 P78.8 P78.9 P79.8 P79.9 P80.8 P80.9 P81.8 P81.9 P82.8 P82.9 P83.8 P83.9 P84.8 P84.9
Bus6Pin1: P85.1 P85.2 P85.3 P85.4 P85.5 P85.6 P85.7 P85.8 P85.9 P85.10 P85.11 P85.12 P85.13 P85.14 P85.15 P85.16 P86.1 P86.2 P86.3 P86.4 P86.9 P86.10 P86.11 P86.12 P86.13 P86.14 P86.15 P86.16
Bus6Pin2: P86.5 P86.6 P86.7 P86.8 P87.1 P87.2 P87.3 P87.4 P87.5 P87.6 P87.7 P87.8 P87.9 P87.10 P87.11 P87.12 P87.13 P87.14 P87.15 P87.16 P88.9 P88.10 P88.11 P88.12 P88.13 P88.14 P88.15 P88.16
Bus6Pin3: P88.1 P88.2 P88.3 P88.4 P88.5 P88.6 P88.7 P88.8 P89.1 P89.2 P89.3 P89.4 P89.5 P89.6 P89.7 P89.8 P89.9 P89.10 P89.11 P89.12 P89.13 P89.14 P89.15 P89.16 P90.13 P90.14 P90.15 P90.16
Bus6Pin4: P90.1 P90.2 P90.3 P90.4 P90.5 P90.6 P90.7 P90.8 P90.9 P90.10 P90.11 P90.12 P91.1 P91.2 P91.3 P91.4 P91.5 P91.6 P91.7 P91.8 P91.9 P91.10 P91.11 P91.12 P91.13 P91.14 P91.15 P91.16
Bus6Pin5: P92.1 P92.2 P92.3 P92.4 P92.5 P92.6 P92.7 P92.8 P92.9 P92.10 P92.11 P92.12 P92.13 P92.14 P92.15 P92.16 P93.1 P93.2 P93.3 P93.4 P93.9 P93.10 P93.11 P93.12 P93.13 P93.14 P93.15 P93.16
Bus6Pin6: P93.5 P93.6 P93.7 P93.8 P94.1 P94.2 P94.3 P94.4 P94.5 P94.6 P94.7 P94.8 P94.9 P94.10 P94.11 P94.12 P94.13 P94.14 P94.15 P94.16 P95.9 P95.10 P95.11 P95.12 P95.13 P95.14 P95.15 P95.16
Bus6Pin7: P95.1 P95.2 P95.3 P95.4 P95.5 P95.6 P95.7 P95.8 P96.1 P96.2 P96.3 P96.4 P96.5 P96.6 P96.7 P96.8 P96.9 P96.10 P96.11 P96.12 P96.13 P96.14 P96.15 P96.16 P97.13 P97.14 P97.15 P97.16
Bus6Pin8: P97.1 P97.2 P97.3 P97.4 P97.5 P97.6 P97.7 P97.8 P97.9 P97.10 P97.11 P97.12 P98.1 P98.2 P98.3 P98.4 P98.5 P98.6 P98.7 P98.8 P98.9 P98.10 P98.11 P98.12 P98.13 P98.14 P98.15 P98.16
Bus7Pin1: P99.1 P99.2 P99.3 P99.4 P99.5 P99.6 P99.7 P99.8 P99.9 P99.10 P99.11 P99.12 P99.13 P99.14 P99.15 P99.16 P100.1 P100.2 P100.3 P100.4 P100.9 P100.10 P100.11 P100.12 P100.13 P100.14 P100.15 P100.16
Bus7Pin2: P100.5 P100.6 P100.7 P100.8 P101.1 P101.2 P101.3 P101.4 P101.5 P101.6 P101.7 P101.8 P101.9 P101.10 P101.11 P101.12 P101.13 P101.14 P101.15 P101.16 P102.9 P102.10 P102.11 P102.12 P102.13 P102.14 P102.15 P102.16
Bus7Pin3: P102.1 P102.2 P102.3 P102.4 P102.5 P102.6 P102.7 P102.8 P103.1 P103.2 P103.3 P103.4 P103.5 P103.6 P103.7 P103.8 P103.9 P103.10 P103.11 P103.12 P103.13 P103.14 P103.15 P103.16 P104.13 P104.14 P104.15 P104.16
Bus7Pin4: P104.1 P104.2 P104.3 P104.4 P104.5 P104.6 P104.7 P104.8 P104.9 P104.10 P104.11 P104.12 P105.1 P105.2 P105.3 P105.4 P105.5 P105.6 P105.7 P105.8 P105.9 P105.10 P105.11 P105.12 P105.13 P105.14 P105.15 P105.16
Bus7Pin5: P106.1 P106.2 P106.3 P106.4 P106.5 P106.6 P106.7 P106.8 P106.9 P106.10 P106.11 P106.12 P106.13 P106.14 P106.15 P106.16 P107.1 P107.2 P107.3 P107.4 P107.9 P107.10 P107.11 P107.12 P107.13 P107.14 P107.15 P107.16
Bus7Pin6: P107.5 P107.6 P107.7 P107.8 P108.1 P108.2 P108.3 P108.4 P108.5 P108.6 P108.7 P108.8 P108.9 P108.10 P108.11 P108.12 P108.13 P108.14 P108.15 P108.16 P109.9 P109.10 P109.11 P109.12 P109.13 P109.14 P109.15 P109.16
Bus7Pin7: P109.1 P109.2 P109.3 P109.4 P109.5 P109.6 P109.7 P109.8 P110.1 P110.2 P110.3 P110.4 P110.5 P110.6 P110.7 P110.8 P110.9 P110.10 P110.11 P110.12 P110.13 P110.14 P110.15 P110.16 P111.13 P111.14 P111.15 P111.16
Bus7Pin8: P111.1 P111.2 P111.3 P111.4 P111.5 P111.6 P111.7 P111.8 P111.9 P111.10 P111.11 P111.12 P112.1 P112.2 P112.3 P112.4 P112.5 P112.6 P112.7 P112.8 P112.9 P112.10 P112.11 P112.12 P112.13 P112.14 P112.15 P112.16
Bus8Pin1: P113.1 P113.2 P113.3 P113.4 P113.5 P113.6 P113.7 P113.8 P113.9 P113.10 P113.11 P113.12 P113.13 P113.14 P113.15 P113.16 P114.1 P114.2 P114.3 P114.4 P114.9 P114.10 P114.11 P114.12 P114.13 P114.14 P114.15 P114.16
Bus8Pin2: P114.5 P114.6 P114.7 P114.8 P115.1 P115.2 P115.3 P115.4 P115.5 P115.6 P115.7 P115.8 P115.9 P115.10 P115.11 P115.12 P115.13 P115.14 P115.15 P115.16 P116.9 P116.10 P116.11 P116.12 P116.13 P116.14 P116.15 P116.16
Bus8Pin3: P116.1 P116.2 P116.3 P116.4 P116.5 P116.6 P116.7 P116.8 P117.1 P117.2 P117.3 P117.4 P117.5 P117.6 P117.7 P117.8 P117.9 P117.10 P117.11 P117.12 P117.13 P117.14 P117.15 P117.16 P118.13 P118.14 P118.15 P118.16
Bus8Pin4: P118.1 P118.2 P118.3 P118.4 P118.5 P118.6 P118.7 P118.8 P118.9 P118.10 P118.11 P118.12 P119.1 P119.2 P119.3 P119.4 P119.5 P119.6 P119.7 P119.8 P119.9 P119.10 P119.11 P119.12 P119.13 P119.14 P119.15 P119.16
Bus8Pin5: P120.1 P120.2 P120.3 P120.4 P120.5 P120.6 P120.7 P120.8 P120.9 P120.10 P120.11 P120.12 P120.13 P120.14 P120.15 P120.16 P121.1 P121.2 P121.3 P121.4 P121.9 P121.10 P121.11 P121.12 P121.13 P121.14 P121.15 P121.16
Bus8Pin6: P121.5 P121.6 P121.7 P121.8 P122.1 P122.2 P122.3 P122.4 P122.5 P122.6 P122.7 P122.8 P122.9 P122.10 P122.11 P122.12 P122.13 P122.14 P122.15 P122.16 P123.9 P123.10 P123.11 P123.12 P123.13 P123.14 P123.15 P123.16
Bus8Pin7: P123.1 P123.2 P123.3 P123.4 P123.5 P123.6 P123.7 P123.8 P124.1 P124.2 P124.3 P124.4 P124.5 P124.6 P124.7 P124.8 P124.9 P124.10 P124.11 P124.12 P124.13 P124.14 P124.15 P124.16 P125.13 P125.14 P125.15 P125.16
Bus8Pin8: P125.1 P125.2 P125.3 P125.4 P125.5 P125.6 P125.7 P125.8 P125.9 P125.10 P125.11 P125.12 P126.1 P126.2 P126.3 P126.4 P126.5 P126.6 P126.7 P126.8 P126.9 P126.10 P126.11 P126.12 P126.13 P126.14 P126.15 P126.16

## Other copper
Top Layer:
  text "Mainboard Adam Mrozek 23 March 2024" at 553,147.32 h1.52

## Silkscreen, mask and mechanical layers (free items; w line width, h text height)
Mechanical 1:
  the board outline again, w1.2